# Altium PCB STEP-UP.PcbDoc
Units mil, origin at the board's own origin, x right, y up, seen from the top; angles counter-clockwise.
Board outline 1100 x 800 mil, 2 copper layers (Top Layer, Bottom Layer); 29 components, 8 nets, 71 pads, 6 vias.
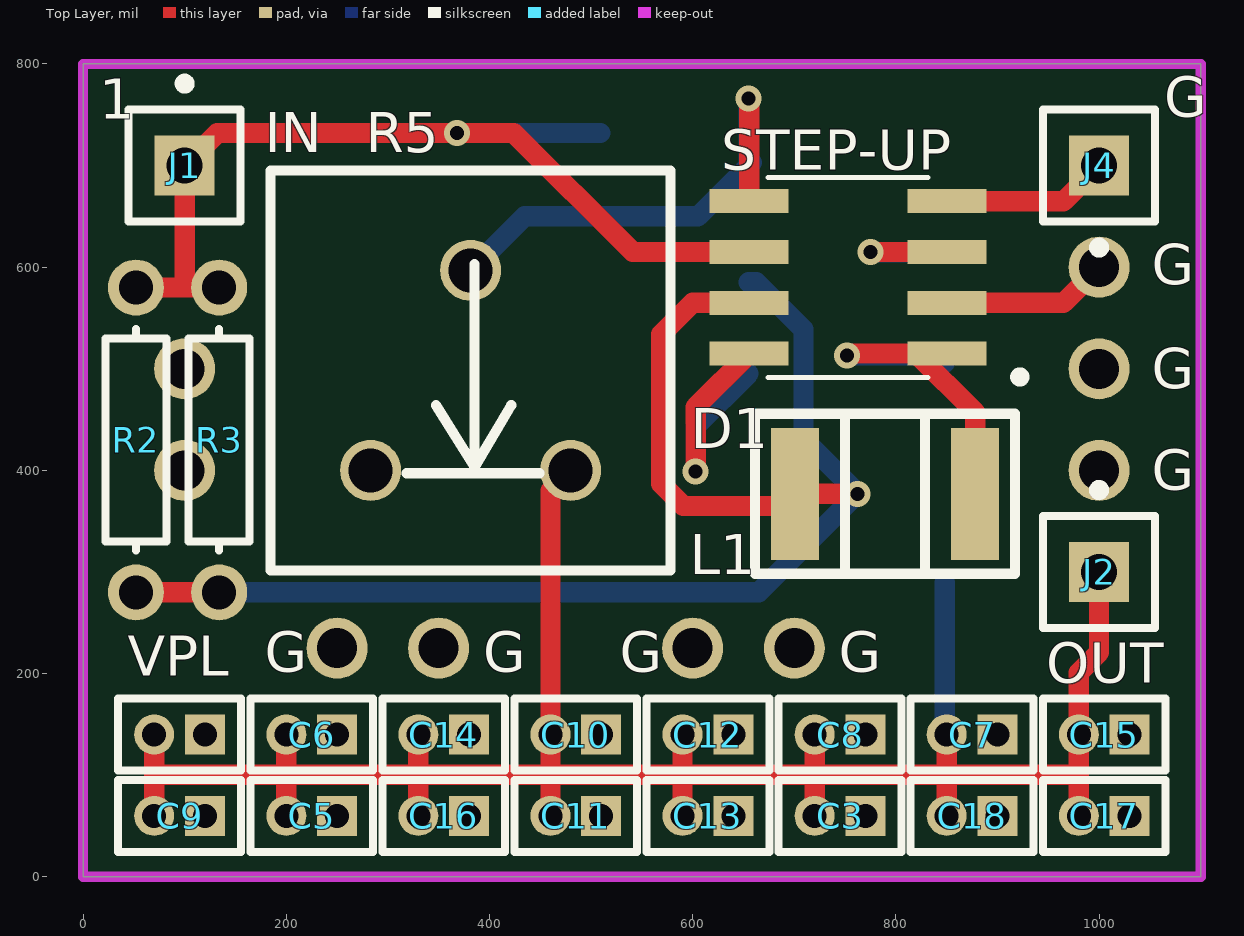
[diagram p0: Top Layer view]
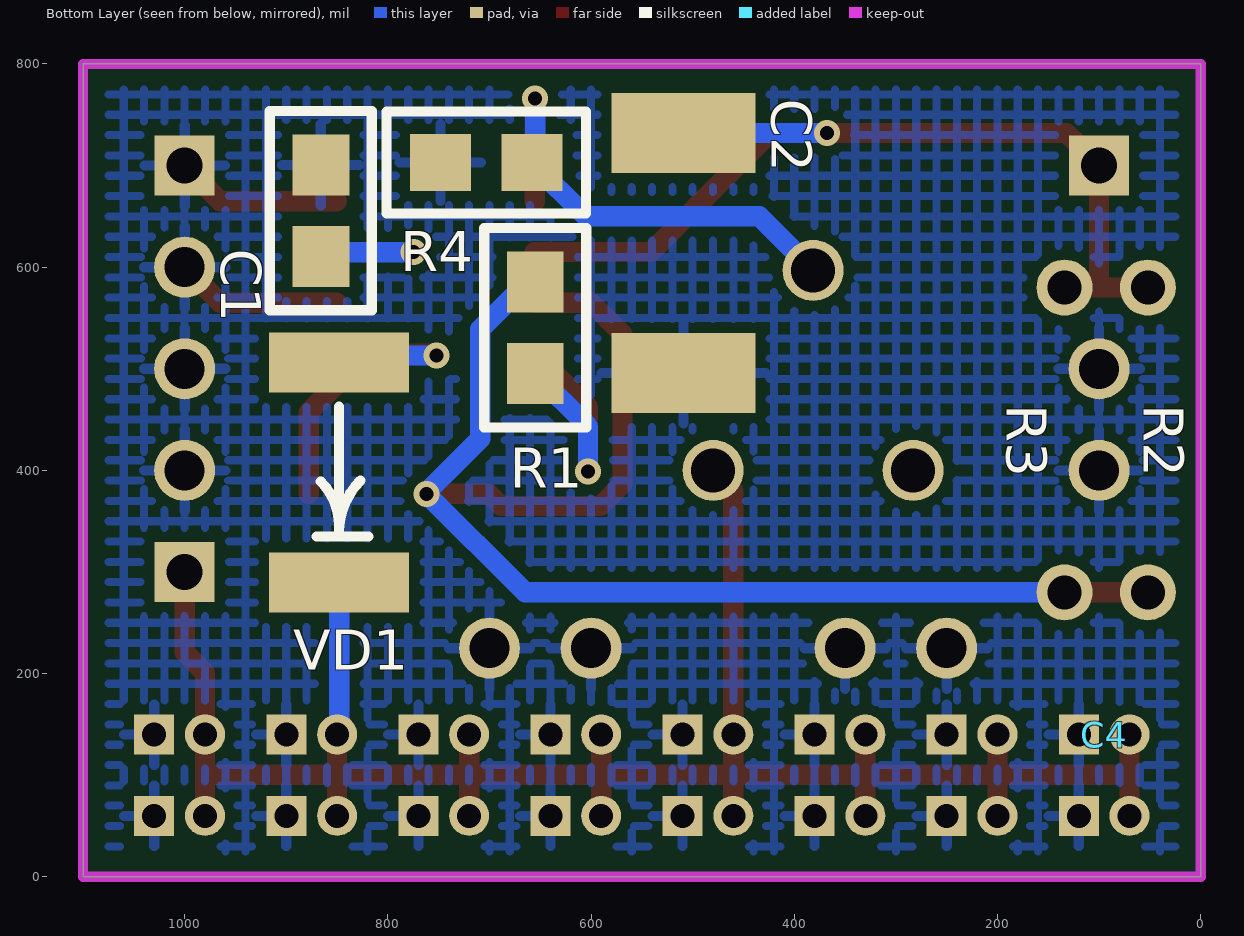
[diagram p1: Bottom Layer view, seen from below]

## Layer stack, top to bottom
Top Solder: solder mask 0.4, Solder Resist, Dk 3.5
Top Layer: signal copper 1.4
Dielectric 1: dielectric 12.6, FR-4, Dk 4.8
Bottom Layer: signal copper 1.4
Bottom Solder: solder mask 0.4, Solder Resist, Dk 3.5

## Board outline
0,0 1100,0 1100,800 0,800

## Design rules (kind name [scope] priority, off if disabled: settings)
Clearance [All] p1: gap=10
PolygonConnect [All] p1: connectstyle=Relief reliefconductorwidth=10 reliefentries=4 polygonreliefangle="90 Angle" airgapwidth=10
RoutingVias [All] p1: holewidth=28 width=50 viastyle="Through Hole" minholewidth=28 minwidth=50 maxholewidth=28 maxwidth=50
SolderMaskExpansion [All] p1: expansion=4
Width [All] p1: maxlimit=39.37 minlimit=5 preferedwidth=10
29 further rules are at their usual default settings.

## Classes and differential pairs
component class Sheet1: C1 C2 C4 C7 C8 C12 C13 C15 C17 C18 D1 J1 J2 J4 L1 R1 R2 R3 R4 R5 VD1

## Components (designator, comment, footprint, x,y, rotation, side; value= is the part's Value field where it differs from the comment)
C1 "1.5n" CAP_SMALL 816,557 r90 bottom
C2 "100,0" Cap_BIG 434,775 r0 bottom
C3 "22,0" MHDR1X2#1 770,60 r180 top
C4 "22,0" MHDR1X2#2 120,140 r0 bottom
C5 "22,0" MHDR1X2#1 250,60 r180 top
C6 "22,0" MHDR1X2#1 250,140 r180 top
C7 "22,0" MHDR1X2#1 900,140 r180 top
C8 "22,0" MHDR1X2#1 770,140 r180 top
C9 "22,0" MHDR1X2#1 120,60 r180 top
C10 "22,0" MHDR1X2#1 510,140 r180 top
C11 "22,0" MHDR1X2#1 510,60 r180 top
C12 "22,0" MHDR1X2#1 640,140 r180 top
C13 "22,0" MHDR1X2#1 640,60 r180 top
C14 "22,0" MHDR1X2#1 380,140 r180 top
C15 "22,0" MHDR1X2#1 1030,140 r180 top
C16 "22,0" MHDR1X2#1 380,60 r180 top
C17 "22,0" MHDR1X2#1 1030,60 r180 top
C18 "22,0" MHDR1X2#1 900,60 r180 top
D1 "MC34063" SOIC127P600X175-8N 753,590 r180 top
J1 "IN" PIN1 100,700 r0 top
J2 "OUT" PIN1 1000,300 r0 top
J4 "G" PIN1 1000,700 r180 top
L1 "INDUCTOR" 1812 878,377 r180 top
R1 "180" RES 606,638 r0 bottom
R2 "0.47" AXIAL-0.3 52,430 r270 top
R3 "0.47" AXIAL-0.3 134,430 r270 top
R4 "2.2k" RES 801,752 r270 bottom
R5 "100k" PODSTR_RES_1 283,400 r0 top
VD1 "TMBYV10" TMBYV10-60 848,506 r270 bottom

## Footprints (in the part's own frame and the unit in brackets; to place one, negate y for a bottom-side part, rotate by r counter-clockwise, add the part's x,y. Pads: shape width x height; smd on the part's side, far side on the other; paste and mask are expansions set on the pad)
1812 [mm] "1812"
  rect 1.2x3.3 smd: 1(0,0) 2(4.5,0)
  silkscreen extent -1,-2 5.5,2
AXIAL-0.3 [mm] "Axial Device, Thru-Hole; 2 Leads; 0.3 in Pin Spacing"
  round 1.4 hole 0.85: 1(-3.81,0) 2(3.81,0)
  silkscreen extent -2.77,-0.76 2.77,0.76
Cap_BIG [mm] "FROM_MAX"
  rect 3.6x2 smd: 1(1.905,7.092) 2(1.905,1.092)
  body extent 0,-0.01 3.81,8.19, height 2.54
CAP_SMALL [mil] "FROM_MAX"
  rect 60x55.98 smd: 1(53.71,50) 2(143.71,50)
  silkscreen extent 1,0 197,100, body extent 20,18 178,82, height 100
MHDR1X2#1 [mm] "Connector; Header; 2 Position"
  rect 1x1 hole 0.6: 1(0,0)
  round 1 hole 0.6: 2(1.27,0)
  silkscreen extent -0.9,-0.9 2.17,0.9
MHDR1X2#2 [mm] "Connector; Header; 2 Position"
  rect 1x1 hole 0.6: 1(0,0)
  round 1 hole 0.6: 2(-1.27,0)
PIN1 [mm] "Connector; Plug"
  rect 1.5x1.5 hole 0.9: 1(0,0)
  silkscreen extent -1.4,-1.4 1.4,2.17
PODSTR_RES_1 [mil] "PODSTR_RES_1"
  round 60 hole 43.31: 1(0,0) 2(98.43,196.85) 3(196.85,0)
  silkscreen extent -98,-98 295,295
RES [mil] "FROM_MAX"
  rect 55.98x60 smd: 1(49,52.71) 2(49,142.71)
  silkscreen extent -1,0 99,196, body extent 17,19 81,177, height 100
SOIC127P600X175-8N [mm]
  rect 1.97x0.6 smd: 1(-2.475,1.905) 2(-2.475,0.635) 3(-2.475,-0.635) 4(-2.475,-1.905) 5(2.475,-1.905) 6(2.475,-0.635) 7(2.475,0.635) 8(2.475,1.905)
  silkscreen extent -4.51,-2.5 2,2.71
TMBYV10-60 [mm] "TMBYV10-60"
  rect 1.5x3.5 smd: 1(0,0) 2(5.5,0)
  silkscreen extent 1.1,-0.56 4.34,0.74

## Part data
C1: library part CAP_SMALL
C2 C3 C4 C5 C6 C7 C8 C9 C10 C11 C12 C13 C14 C15 C16 C17 C18: library part CAP_BIG
D1: library part MC34063A/E
J1 J2 J4: library part Socket, "Socket"
R1 R4: library part RES
R2 R3: library part Res1, "Resistor"
R5: library part RES_PODSTR_1
VD1: library part TMBYV10-60

## Free pads (board coordinates)
  round 60 hole 39.37: 0(100,400) 0(100,500) 0(250,225) 0(350,225) 0(600,225) 0(700,225) 0(1000,400) 0(1000,500) 0(1000,600)

## Via types
v1: diameter 25.59, hole 13.78, Top Layer to Bottom Layer, 6 vias

## Nets (pads, with @x,y where several pads share a name; then routed paths per layer and width w, separated by ;. In a path a pad name is that pad's centre, name@x,y a point inside that pad or via, vN(x,y) a via of type N, cw(c..) or ccw(c..) an arc to the next point about the centre after c; other vN are vias at no path point)
GND: C1.2 C2.1 C3.1 C4.1 C5.1 C6.1 C7.1 C8.1 C9.1 C10.1 C11.1 C12.1 C13.1 C14.1 C15.1 C16.1 C17.1 C18.1 D1.2 D1.4 J4.1 pad.0 R4.1 | length 328.1
  Top Layer w20: D1.2 965,565 pad.0@1000,600 ; D1.4 965,665 J4.1
NetC1_1: C1.1 D1.3 | length 165.1
  Top Layer w20: v1(775,615) D1.3
  Bottom Layer w20: v1@775.29,614.71 C1.1@865,614.71
NetC2_2: C2.2 D1.6 J1.1 R2.1 R3.1 | length 961.5
  Top Layer w20: R2.1 97,580 ; R3.1 97,580 ; D1.6 541,615 424,732 v1(368,732) 132,732 J1.1 100,583 97,580
  Bottom Layer w20: v1(368,732) C2.2
NetC3_2: C3.2 C4.2 C5.2 C6.2 C7.2 C8.2 C9.2 C10.2 C11.2 C12.2 C13.2 C14.2 C15.2 C16.2 C17.2 C18.2 J2.1 R5.3 VD1.2 | length 2138.5
  Top Layer w20: C9.2 70,102 ; C4.2 70,102 ; C5.2 200,100.32 ; C6.2 200,100.32 ; C16.2 330,100.32 ; C14.2 330,100.32 ; C11.2 460,100.32 ; R5.3 460,380.15 C10.2 460,100.32 ; C13.2 590,100.32 ; C12.2 590,100.32 ; C3.2 720,100.32 ; C8.2 720,100.32 ; C18.2 850,100.32 ; C7.2 850,100.32 ; C17.2 980,98 ; J2.1 1000,221 980,201 C15.2 980,98 ; 70,102 71.69,100.32 200,100.32 ; 200,100.32 330,100.32 ; 330,100.32 460,100.32 ; 460,100.32 590,100.32 ; 590,100.32 720,100.32 ; 720,100.32 850,100.32 ; 850,100.32 977.69,100.32 980,98
  Bottom Layer w20: VD1.2 848,142 C7.2
NetD1_1: D1.1 L1.1 VD1.1 | length 328.9
  Top Layer w20: v1@752,515 820,515 878,457 L1.1
  Bottom Layer w20: v1(752,513) 841,513 VD1.1
NetD1_5: D1.5 R4.2 R5.2 | length 485.8
  Top Layer w20: D1.5 v1@655.56,765.56
  Bottom Layer w20: R5.2 434.58,650 605.29,650 R4.2 655,706.29 v1(655,766)
NetD1_7: D1.7 L1.2 R1.1 R2.2 R3.2 | length 1461.4
  Top Layer w20: R2.2 R3.2 ; D1.7 600,565 569,534 569,386.62 590.62,365 688.84,365 L1.2 v1(762,377)
  Bottom Layer w20: R3.2 665,280 v1(762,377) 762.5,377.5 709,431 709,539 662.71,585.29 R1.1
NetD1_8: D1.8 R1.2 | length 255.6
  Top Layer w20: v1(603,399) 603,462.44 D1.8
  Bottom Layer w20: v1(603,399) 603,443.29 R1.2
pads on no net: R5.1

## Polygon pours and split planes (outlines as drawn)
GND on Bottom Layer "Bottom Layer-No Net" (hatched 90Degree grid 20 track 8, remove dead copper, pour order 5): 25,775 25,25 1075,25 1075,775 25,775

## Keep-outs
Keep-Out Layer:
  the board outline again, w10

## Silkscreen, mask and mechanical layers (free items; w line width, h text height)
Top Overlay:
  circle w10: c922,492 r4.47
  text "1" at 16,746 h39.37
  text "STEP-UP" at 628,696 h39.37
  text "G" at 1052,583 h39.37
  text "G" at 1052,481 h39.37
  text "G" at 1052,381 h39.37
  text "G" at 179,202 h39.37
  text "G" at 394,202 h39.37
  text "G" at 528,202 h39.37
  text "G" at 744,202 h39.37
  text "VPL" at 44,198 h39.37